# EAGLE board BEP3_Test_Interface2 (EAGLE 6.4)
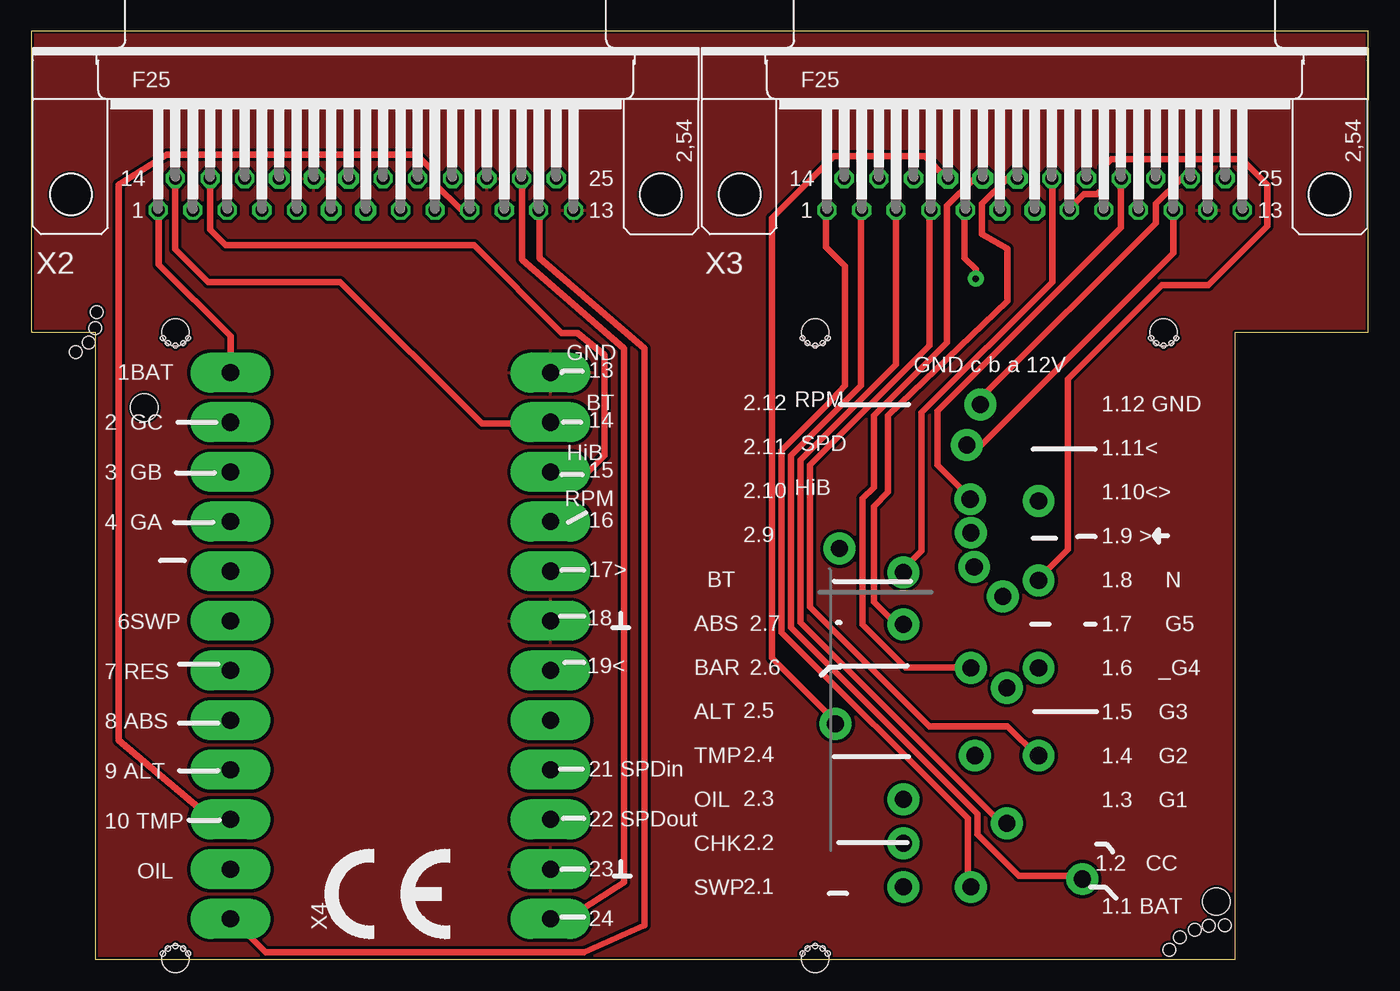
[diagram p0: board, top side]
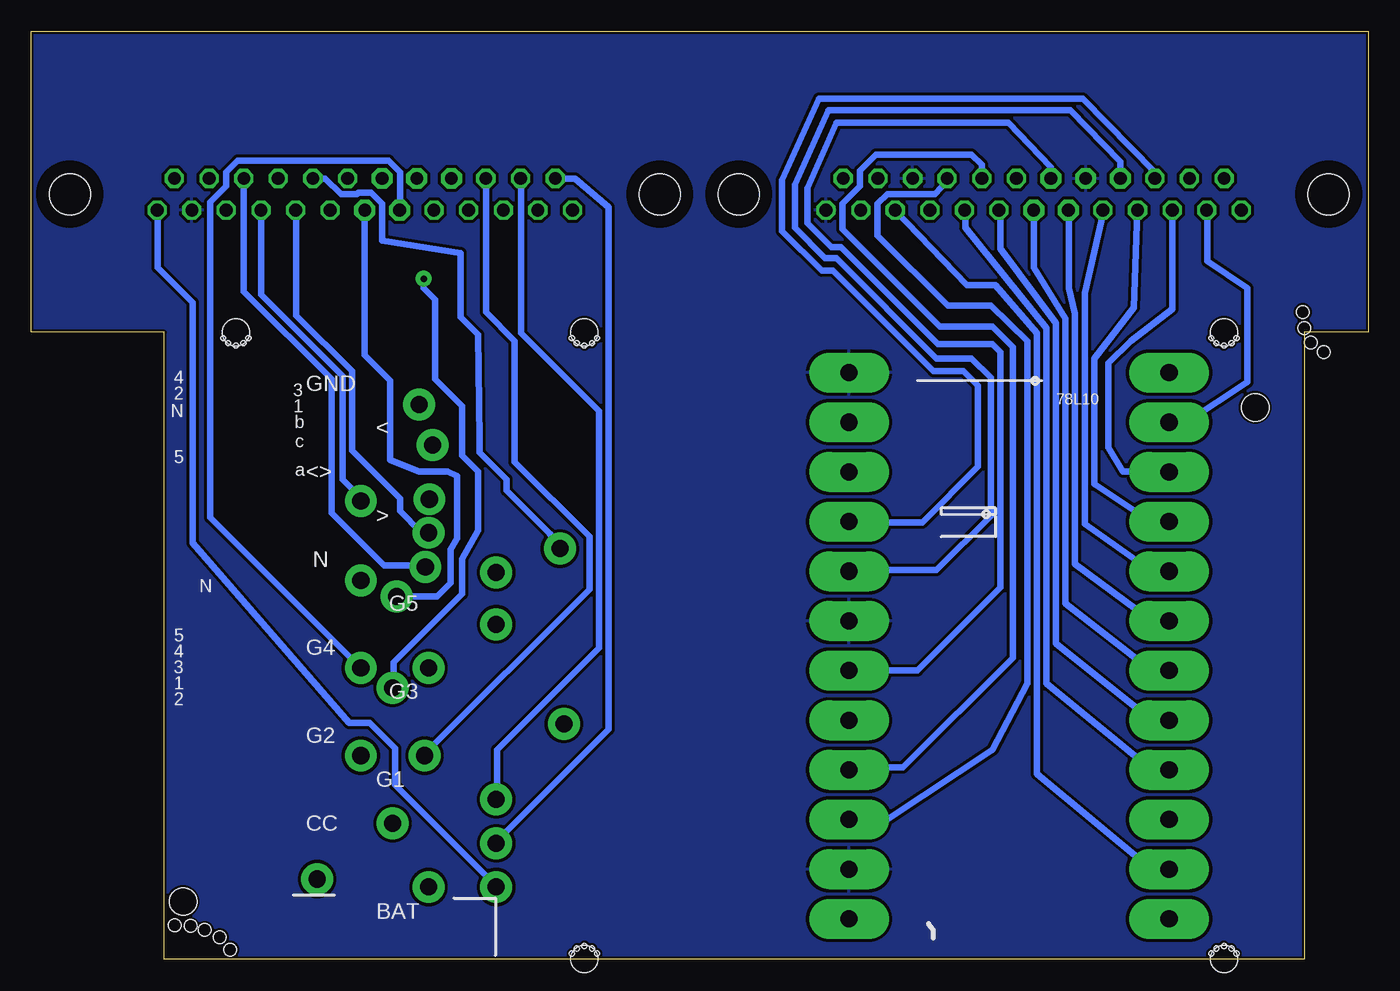
[diagram p1: board, bottom side, seen from below]

Size 106.6 x 74 mm. Coordinates in mm from the lower left corner, seen from the top.
Outline: 106.6,74 0,74 0,50 5.08,50 5.08,0 96,0 96,50 106.6,50 106.6,74
Copper layers (1*16): Top 0.035mm / dielectric 1.5mm / Bottom 0.035mm
Design rules "default *": minimum track width 20mil, minimum drill 20mil, track to track 10mil, track to pad 10mil, pad to pad 10mil, via to via 10mil, smd to smd 8mil, copper to edge 8mil, drill to drill 8mil, minimum pad ring 10mil, minimum via ring 15mil, stop-mask expansion 4mil, vias tented up to drill 0mil, thermal gap 10mil
Holes 1.02 mm at 95.19,2.71 93.92,2.64 92.77,2.33 91.57,1.75 90.76,0.77 3.56,48.43 4.57,49.19 5.21,51.6 95.19,2.71 93.92,2.64 92.77,2.33 91.57,1.75 5.08,50.33
Holes 2.18 mm at 94.5,4.6 9,44 11.5,50 62.5,50 11.5,0 62.5,0 90.3,50 94.5,4.6
Holes 0.4 mm at 62.5,1.06 61.9,0.86 61.5,0.46 63.1,0.86 63.5,0.46 11.5,1.06 10.9,0.86 10.5,0.46 12.1,0.86 12.5,0.46 11.5,48.94 12.1,49.14 12.5,49.54 10.9,49.14 10.5,49.54 62.5,48.94 63.1,49.14 63.5,49.54 61.9,49.14 61.5,49.54 90.3,48.94 90.9,49.14 91.3,49.54 89.7,49.14 89.3,49.54

## Footprints (pad centres in the part's own frame; a part is rotated, then mirrored left to right if it is on the bottom)
1,36ID = drill 1.36 pad 2.54: P$1 0,0
F25H = drill 1.016 octagon: 1 -16.561,-1.27; 2 -13.792,-1.27; 3 -11.049,-1.27; 4 -8.28,-1.27; 5 -5.512,-1.27; 8 2.769,-1.27; 9 5.512,-1.27; 10 8.28,-1.27; 11 11.049,-1.27; 12 13.792,-1.27; 13 16.561,-1.27; 14 -15.189,1.27; 15 -12.421,1.27; 16 -9.652,1.27; 20 1.372,1.27; 21 4.14,1.27; 22 6.909,1.27; 23 9.652,1.27; 24 12.421,1.27; 25 15.189,1.27 | drill 1.016 pad 1.67 octagon: 6 -2.769,-1.27; 7 0,-1.27; 17 -6.909,1.27; 18 -4.14,1.27; 19 -1.372,1.27 | hole 3.302: -23.52,0; 23.52,0
24-TESTPIN_1,36ID = drill 1.36 pad 3.2 long: P1 -21.78,-12.76; P2 -17.82,-12.76; P3 -13.86,-12.76; P4 -9.9,-12.76; P5 -5.94,-12.76; P6 -1.98,-12.76; P7 1.98,-12.76; P8 5.94,-12.76; P9 9.9,-12.76; P10 13.86,-12.76; P11 17.82,-12.76; P12 21.78,-12.76; P13 -21.78,12.76; P14 -17.82,12.76; P15 -13.86,12.76; P16 -9.9,12.76; P17 -5.94,12.76; P18 -1.98,12.76; P19 1.98,12.76; P20 5.94,12.76; P21 9.9,12.76; P22 13.86,12.76; P23 17.82,12.76; P24 21.78,12.76

## Placement (x,y rotation side)
TP1  TPSFEDERPIN  [1,36ID]  74.93,5.76 0 bottom
TP2  TPSFEDERPIN  [1,36ID]  83.82,6.39 0 bottom
TP3  TPSFEDERPIN  [1,36ID]  77.79,10.84 0 bottom
TP4  TPSFEDERPIN  [1,36ID]  80.33,16.23 0 bottom
TP5  TPSFEDERPIN  [1,36ID]  77.79,21.63 0 bottom
TP6  TPSFEDERPIN  [1,36ID]  80.33,23.22 0 bottom
TP7  TPSFEDERPIN  [1,36ID]  77.47,28.93 0 bottom
TP8  TPSFEDERPIN  [1,36ID]  80.33,30.2 0 bottom
TP9  TPSFEDERPIN  [1,36ID]  74.93,34.01 0 bottom
TP10  TPSFEDERPIN  [1,36ID]  80.33,36.55 0 bottom
TP11  TPSFEDERPIN  [1,36ID]  74.61,41 0 bottom
TP12  TPSFEDERPIN  [1,36ID]  69.53,5.76 0 bottom
TP13  TPSFEDERPIN  [1,36ID]  75.69,44.24 0 bottom
TP16  TPSFEDERPIN  [1,36ID]  69.53,9.25 0 bottom
TP17  TPSFEDERPIN  [1,36ID]  69.53,12.74 0 bottom
TP18  TPSFEDERPIN  [1,36ID]  75.25,16.23 0 bottom
TP19  TPSFEDERPIN  [1,36ID]  64.14,18.77 0 bottom
TP21  TPSFEDERPIN  [1,36ID]  74.93,23.22 0 bottom
TP22  TPSFEDERPIN  [1,36ID]  69.53,26.71 0 bottom
TP23  TPSFEDERPIN  [1,36ID]  69.53,30.84 0 bottom
TP24  TPSFEDERPIN  [1,36ID]  64.45,32.74 0 bottom
TP25  TPSFEDERPIN  [1,36ID]  74.87,36.68 0 bottom
TP26  TPSFEDERPIN  [1,36ID]  75.18,31.28 0 bottom
U$1  [CE_10.00]  23.37,1.56 0 top
X2  [F25H]  26.67,61 0 top
X3  [F25H]  80.01,61 0 top
X4  [24-TESTPIN_1,36ID]  28.64,25 90 top

## Library data of the parts
TP1-TP13 TP16-TP19 TP21-TP26 = testpin_BMW
U$1 = logo
X2 X3 = con-subd; OC_FARNELL: unknown; OC_NEWARK: unknown
X4 = con_BMW

## Nets
BMW1: X2.1 X4.P24
BMW2: X2.2 X4.P23
BMW3: X2.3 X4.P22
BMW4: X2.4 X4.P21
BMW5: X2.5 X4.P20
BMW6: X2.6 X4.P19
BMW7: X2.7 X4.P18
BMW8: X2.8 X4.P17
BMW9: X2.9 X4.P16
BMW10: X2.10 X4.P15
BMW11: X2.11 X4.P14
BMW12: X2.12 X4.P13
BMW14: X2.14 X4.P11
BMW15: X2.15 X4.P10
BMW16: X2.16 X4.P9
BMW17: X2.17 X4.P8
BMW19: X2.19 X4.P6
BMW20: X2.20
BMW21: X2.21 X4.P4
BMW22: X2.22 X4.P3
BMW24: X2.24 X4.P1
GND: X2.13 X2.18 X2.23 X3.12 X4.P2 X4.P7 X4.P12
N$1: X4.P5
WAGO1: TP1.P$1 X3.1
WAGO2: TP2.P$1 X3.2
WAGO3: TP3.P$1 X3.3
WAGO4: TP4.P$1 X3.4
WAGO5: TP5.P$1 X3.5
WAGO6: TP6.P$1 X3.6
WAGO7: TP7.P$1 X3.7
WAGO8: TP8.P$1 X3.8
WAGO9: TP9.P$1 X3.9
WAGO10: TP10.P$1 X3.10
WAGO11: TP11.P$1 X3.11
WAGO13: TP12.P$1 X3.13
WAGO14: TP16.P$1 X3.14
WAGO15: TP17.P$1 X3.15
WAGO16: TP18.P$1 X3.16
WAGO17: TP19.P$1 X3.17
WAGO18: TP21.P$1 X3.18
WAGO19: TP22.P$1 X3.19
WAGO20: TP23.P$1 X3.20
WAGO21: TP24.P$1 X3.21
WAGO22: TP25.P$1 X3.22
WAGO23: TP26.P$1 X3.23
WAGO24: TP13.P$1 X3.24

## Tracks (layer width: path | path; a pad name or v marks a point on that pad's centre or on a via)
BMW1
  Top 0.508: X4.P24 15.88,49.7 10.16,55.41 10.16,59.73 X2.1
BMW2
  Bottom 0.508: X2.2 12.83,59.73 12.83,55.67 9.65,53.51 9.65,46.01 14.48,42.84 15.88,42.84 X4.P23
BMW3
  Bottom 0.508: X2.3 15.62,51.86 18.92,49.32 20.7,47.54 20.7,40.81 19.56,38.9 15.88,38.9 X4.P22
BMW4
  Bottom 0.508: X2.4 18.41,59.73 18.67,51.98 21.84,47.92 21.84,37.89 17.4,34.97 15.88,34.97 X4.P21
BMW5
  Bottom 0.508: X2.5 21.08,59.73 22.61,53.13 22.61,34.71 17.4,31.03 15.88,31.03 X4.P20
BMW6
  Bottom 0.508: X2.6 23.88,59.73 23.88,53.51 23.37,51.48 23.37,31.54 17.4,27.09 15.88,27.09 X4.P19
BMW7
  Bottom 0.508: X2.7 26.67,55.16 24.13,51.09 24.13,28.36 17.27,23.03 X4.P18
BMW8
  Bottom 0.508: X2.8 29.34,59.73 29.34,56.68 24.89,50.71 24.89,25.19 17.27,19.09 15.88,19.09 X4.P17
BMW9
  Bottom 0.508: X2.9 32.13,59.73 32.13,58.33 25.65,50.33 25.65,22.01 17.27,15.15 15.88,15.15 X4.P16
BMW10
  Top 0.508: X2.10 34.29,59.73 32.13,61.89 32.13,62.78 30.73,64.17 10.79,64.17 6.99,61.76 6.99,17.44 14.35,11.22 15.88,11.22 X4.P15
BMW11
  Bottom 0.508: X2.11 32,53.76 29.72,53.76 26.42,49.95 26.42,14.77 17.4,7.28 15.88,7.28 X4.P14
BMW12
  Top 0.508: X2.12 40.51,59.73 40.51,55.92 48.9,48.68 48.9,2.71 44.07,0.55 18.67,0.55 15.88,3.34 X4.P13
BMW14
  Top 0.508: X2.14 11.48,56.63 14.1,54.02 24.64,54.02 35.94,42.71 41.29,42.71 X4.P11
BMW15
  Top 0.508: X2.15 14.25,58.18 15.49,56.94 35.31,56.94 42.29,49.95 43.56,49.95 45.72,48.17 45.72,40.17 44.32,38.77 41.48,38.77 X4.P10
BMW16
  Bottom 0.508: X2.16 17.02,62.78 22.73,68.62 43.81,68.62 46.74,62.14 46.74,58.08 43.56,54.9 42.67,54.9 34.67,46.9 32.26,46.9 31.11,45.76 31.11,39.28 35.56,34.84 41.33,34.84 X4.P9
BMW17
  Bottom 0.508: X2.17 19.76,63.62 23.75,67.73 43.05,67.73 45.72,61.76 45.72,58.33 43.31,55.92 42.42,55.92 34.42,47.92 31.62,47.92 30.1,46.4 30.1,35.35 34.42,31.03 41.4,31.03 41.78,30.65 41.69,30.65 X4.P8
BMW19
  Bottom 0.508: X2.19 25.3,63.18 28.7,66.72 42.42,66.72 44.7,61.51 44.7,58.71 42.8,56.81 42.04,56.81 34.29,49.06 29.97,49.06 29.34,48.43 29.34,29.63 35.94,23.03 41.39,23.03 X4.P6
BMW21
  Bottom 0.508: X2.21 30.81,63.36 31.62,64.17 39.24,64.17 40.51,62.91 40.51,61.64 41.91,60.24 41.91,58.21 34.16,50.46 29.97,50.46 28.32,48.81 28.32,24.04 37.08,15.28 41.22,15.28 X4.P4
BMW22
  Bottom 0.406: 33.53,62.27 33.53,62.14
  Bottom 0.508: 33.53,62.27 X2.22 | X4.P3 38.23,11.22 29.97,16.68 27.18,22.01 27.18,49.32 30.1,52.11 33.53,52.11 39.12,57.7 39.12,60.24 38.35,61 34.54,61 33.53,62.14
BMW24
  Top 0.508: X2.24 39.12,62.27 39.12,55.79 47.24,48.68 47.24,6.14 42.93,3.34 41.4,3.34 X4.P1
GND
  pour Bottom (rank 3): 0.08,74.08 107.89,74.08 104.2,0.06 85.84,0.2 -0.56,-0.47
  pour Top: -0.43,74.08 107.89,74.08 104.2,-0.06 -0.56,-0.59
N$2  (via drill 0.6)
  other vias: 3.15,61
N$3  (via drill 0.6)
  other vias: 50.19,61
N$4  (via drill 0.6)
  other vias: 56.49,61
N$5  (via drill 0.6)
  other vias: 103.53,61
WAGO1
  Top 0.508: TP1.P$1 74.68,6.01 74.68,11.22 59.82,26.07 59.82,40.55 63.37,44.11 64.9,45.76 64.9,55.28 63.37,56.81 63.37,59.73 X3.1
WAGO2
  Top 0.508: TP2.P$1 83.57,6.64 78.74,6.64 75.44,9.95 75.44,11.6 60.58,26.46 60.58,40.17 66.17,45.76 66.17,59.73 X3.2
WAGO3
  Top 0.508: X3.3 68.96,47.41 61.34,39.79 61.34,26.84 77.34,10.84 TP3.P$1
WAGO4
  Top 0.508: X3.4 71.63,59.73 71.63,48.94 62.1,39.41 62.1,28.11 71.63,18.58 77.85,18.58 80.26,16.17 TP4.P$1
WAGO5  (via drill 0.51)
  Top 0.508: v75.31,54.27 75.31,55.03 74.42,55.92 74.42,59.73 X3.5
  Bottom 0.508: v75.31,54.27 75.31,53.51 74.42,52.62 74.42,46.27 72.26,44.11 72.26,40.17 70.99,38.9 70.99,34.2 72.26,31.92 72.26,29.12 77.72,23.66 77.72,21.63 TP5.P$1
WAGO6
  Bottom 0.508: TP6.P$1 92.33,35.22 92.33,60.37 91.06,61.64 91.06,62.78 90.17,63.67 78.11,63.67 77.22,62.78 77.22,59.73 X3.6
WAGO7
  Bottom 0.508: X3.7 80.01,48.17 77.98,46.14 77.98,39.79 75.69,38.9 73.41,38.9 72.64,38.52 72.64,33.57 73.15,32.68 73.15,30.01 74.23,28.93 TP7.P$1
WAGO8
  Top 0.508: TP8.P$1 80.26,30.27 82.68,32.68 82.68,46.27 90.17,53.76 93.85,53.76 98.55,58.46 98.55,61.76 96.52,63.79 86.11,63.79 85.47,63.16 85.47,61.51 84.96,61 83.95,61 82.74,59.79 | 82.68,59.73 82.74,59.79 | X3.8 82.8,59.73 82.74,59.79
WAGO9
  Bottom 0.508: X3.9 85.47,59.73 85.47,51.35 81.03,46.9 81.03,40.55 77.22,36.74 77.22,35.73 75.56,34.08 74.93,34.08 TP9.P$1
WAGO10
  Bottom 0.508: X3.10 88.27,59.73 88.27,53 81.79,46.52 81.79,38.27 80.39,36.87 80.39,36.62 TP10.P$1
WAGO11
  Top 0.508: X3.11 91.06,56.3 75.69,40.93 74.68,40.93 TP11.P$1
WAGO13
  Bottom 0.508: X3.13 96.52,59.73 96.52,55.16 93.73,52.36 93.73,33.19 81.28,18.84 79.63,18.84 77.6,16.8 77.6,13.88 69.47,5.76 TP12.P$1
WAGO14
  Bottom 0.508: X3.14 63.25,62.27 60.58,59.98 60.58,18.33 69.6,9.31 TP16.P$1
WAGO15
  Bottom 0.508: X3.15 67.56,62.27 67.56,49.95 61.34,43.73 61.34,24.8 69.47,16.68 69.47,12.74 TP17.P$1
WAGO16
  Bottom 0.508: X3.16 70.36,51.6 68.07,49.32 68.07,39.66 62.1,33.7 62.1,29.5 75.31,16.3 TP18.P$1
WAGO17
  Top 0.508: TP19.P$1 64.14,18.96 59.05,24.04 59.05,59.09 64.01,64.05 71.25,64.05 73.03,62.27 X3.17
WAGO18
  Top 0.508: X3.18 75.18,62.27 73.03,60.11 73.03,49.19 67.18,43.35 67.18,37.63 66.29,36.74 66.29,26.71 69.72,23.28 74.93,23.28 TP21.P$1
WAGO19
  Top 0.508: X3.19 77.85,62.27 75.82,60.24 75.82,57.83 77.85,56.68 77.85,52.49 68.33,43.35 68.33,37.25 67.18,36.11 67.18,28.49 69.47,26.2 69.47,26.71 TP22.P$1
WAGO20
  Top 0.508: X3.20 81.41,62.27 81.41,54.02 70.99,43.6 70.99,32.55 69.6,31.16 69.6,30.9 TP23.P$1
WAGO21
  Bottom 0.508: X3.21 83.19,62.27 81.92,61 80.64,61 80.52,61.13 79.5,61.13 78.61,60.24 78.61,57.32 72.39,56.3 72.39,51.22 70.99,49.82 70.87,41.44 70.87,40.43 68.71,38.27 68.71,37.38 65.28,33.95 64.39,32.81 TP24.P$1
WAGO22
  Top 0.508: X3.22 86.87,62.27 86.87,58.33 72.26,43.73 72.26,39.41 74.93,36.74 TP25.P$1
WAGO23
  Bottom 0.508: X3.23 89.66,53.25 82.68,46.27 82.68,35.6 78.49,31.41 75.31,31.41 TP26.P$1
WAGO24
  Top 0.508: X3.24 91.69,62.27 89.66,60.24 89.66,58.71 75.69,44.74 TP13.P$1

## Text on the board
bPlace: 4 | 3 | 2 | 1 | b | c | 5 | a | 5 | 4 | 3 | 1 | 2
tNames: GND c b a 12V | GND / BT / HiB | RPM | RPM / SPD / HiB | 18 | 19< | 2.7 / 2.6 | 1.12 GND / 1.11< / 1.10<> / 1.9 > / 1.8 N / 1.7 G5 / 1.6 _G4 / 1.5 G3 / 1.4 G2 / 1.3 G1 | 1.2 CC | BT / ABS / BAR / ALT / TMP / OIL / CHK / SWP | 1.1 BAT | 1BAT / 2 GC / 3 GB / 4 GA / / 6SWP / 7 RES / 8 ABS / 9 ALT / 10 TMP / OIL | 2.12 / 2.11 / 2.10 / 2.9 / / / / 2.5 / 2.4 / 2.3 / 2.2 / 2.1 | 13 / 14 / 15 / 16 / 17> / / / / 21 SPDin / 22 SPDout / 23 / 24
bNames: 78L10 | N | N | < / / > / / G5 / / G3 / / G1 / / / BAT | GND / / <> / / N / / G4 / / G2 / / CC
tValues: set jumper for / motoscope tiny / support
bValues: BA | BA | 6,8 | 2.4V/1.1V | 4 | 13 GND / 14 BT / 15 HiB / 16 RPM / 17 > / 18 GND / 19 < / / 21 SPD in / 22 SPD o / 23 GND | SPD / / WRN / / ABS / / ALT / / OIL / / SWP | RPM / / HiB / / BT / / BAR / / TMP / / CHK | BA | BA | 1 BAT / 2 GC / 3 GB / 4 GA / 5 START / 6 SWP / 7R ES / 8A BS / 9 / 10 TMP / 11 OIL / 12CH K